# Altium PCB Slave.PcbDoc (part 1 of 2)
Units mm, origin at the board's own origin, x right, y up, seen from the top; angles counter-clockwise.
Board outline 380 x 63 mm, 4 copper layers (Top Copper, Signal Layer 1, Signal Layer 2, Bottom Copper), stack 1.57 mm thick; 247 components, 208 nets, 792 pads, 0 vias.
Unrouted connection lines stored in the file: 502.
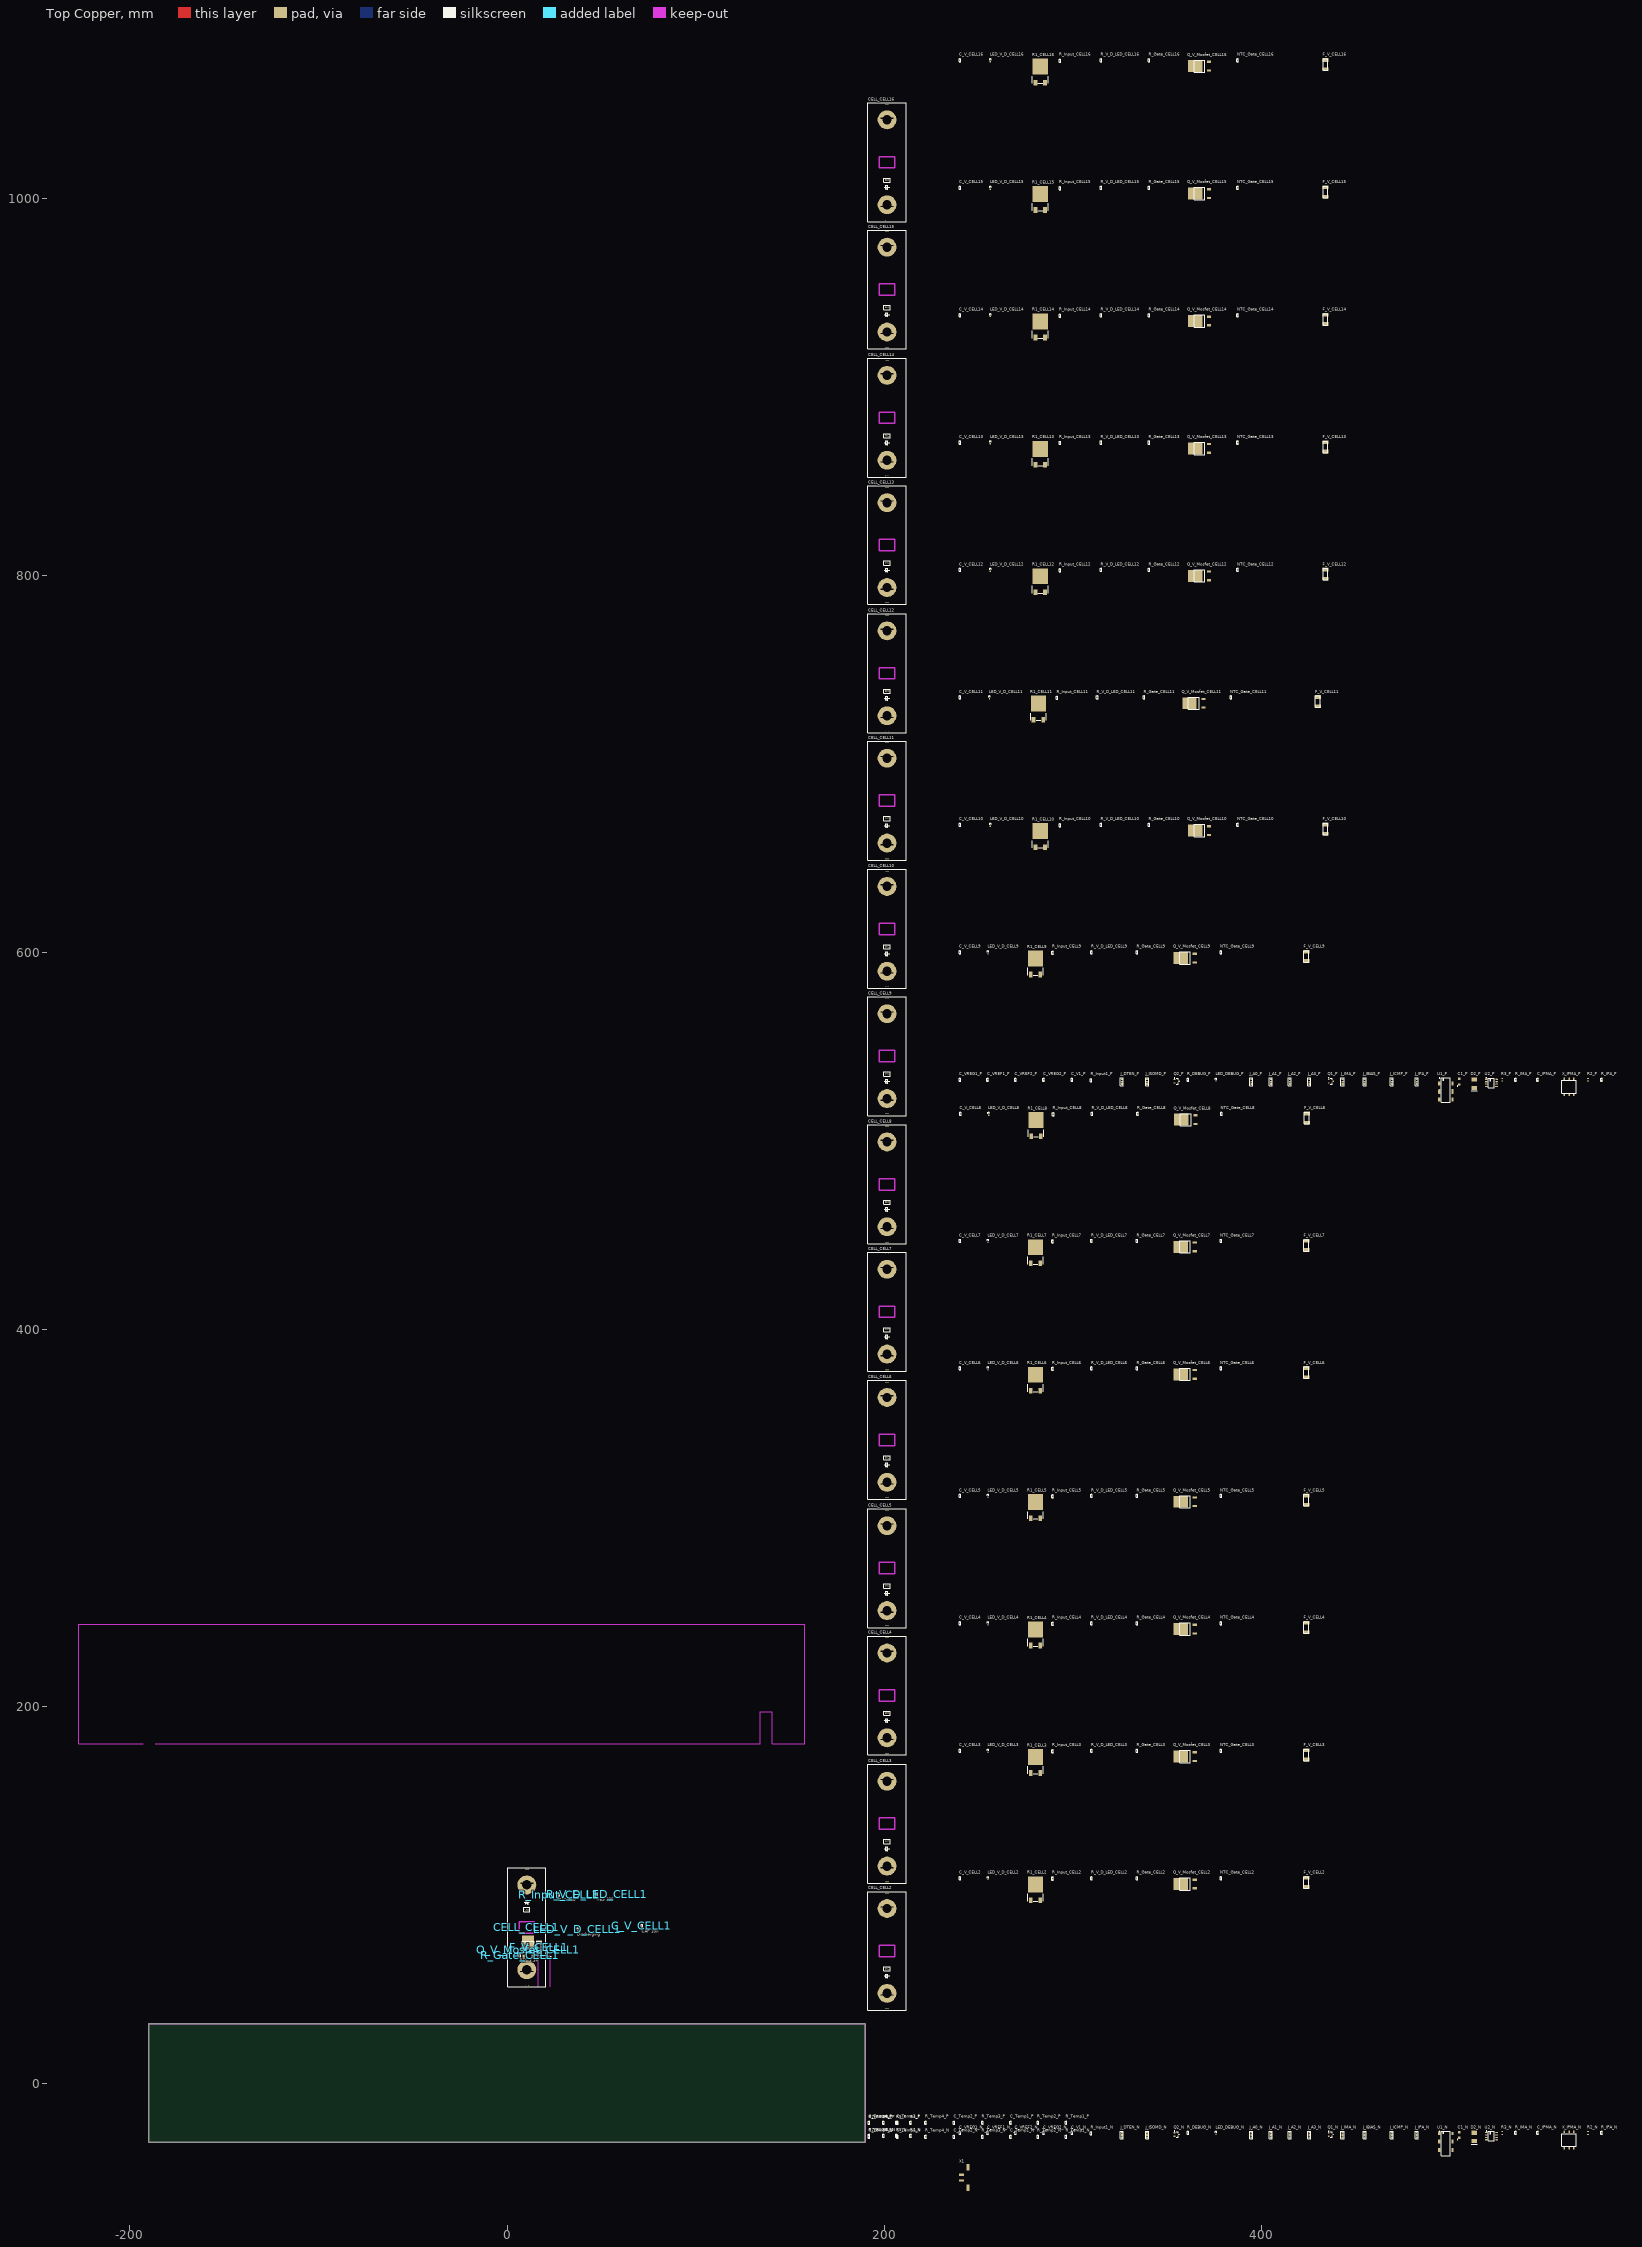
[diagram p0: Top Copper view]
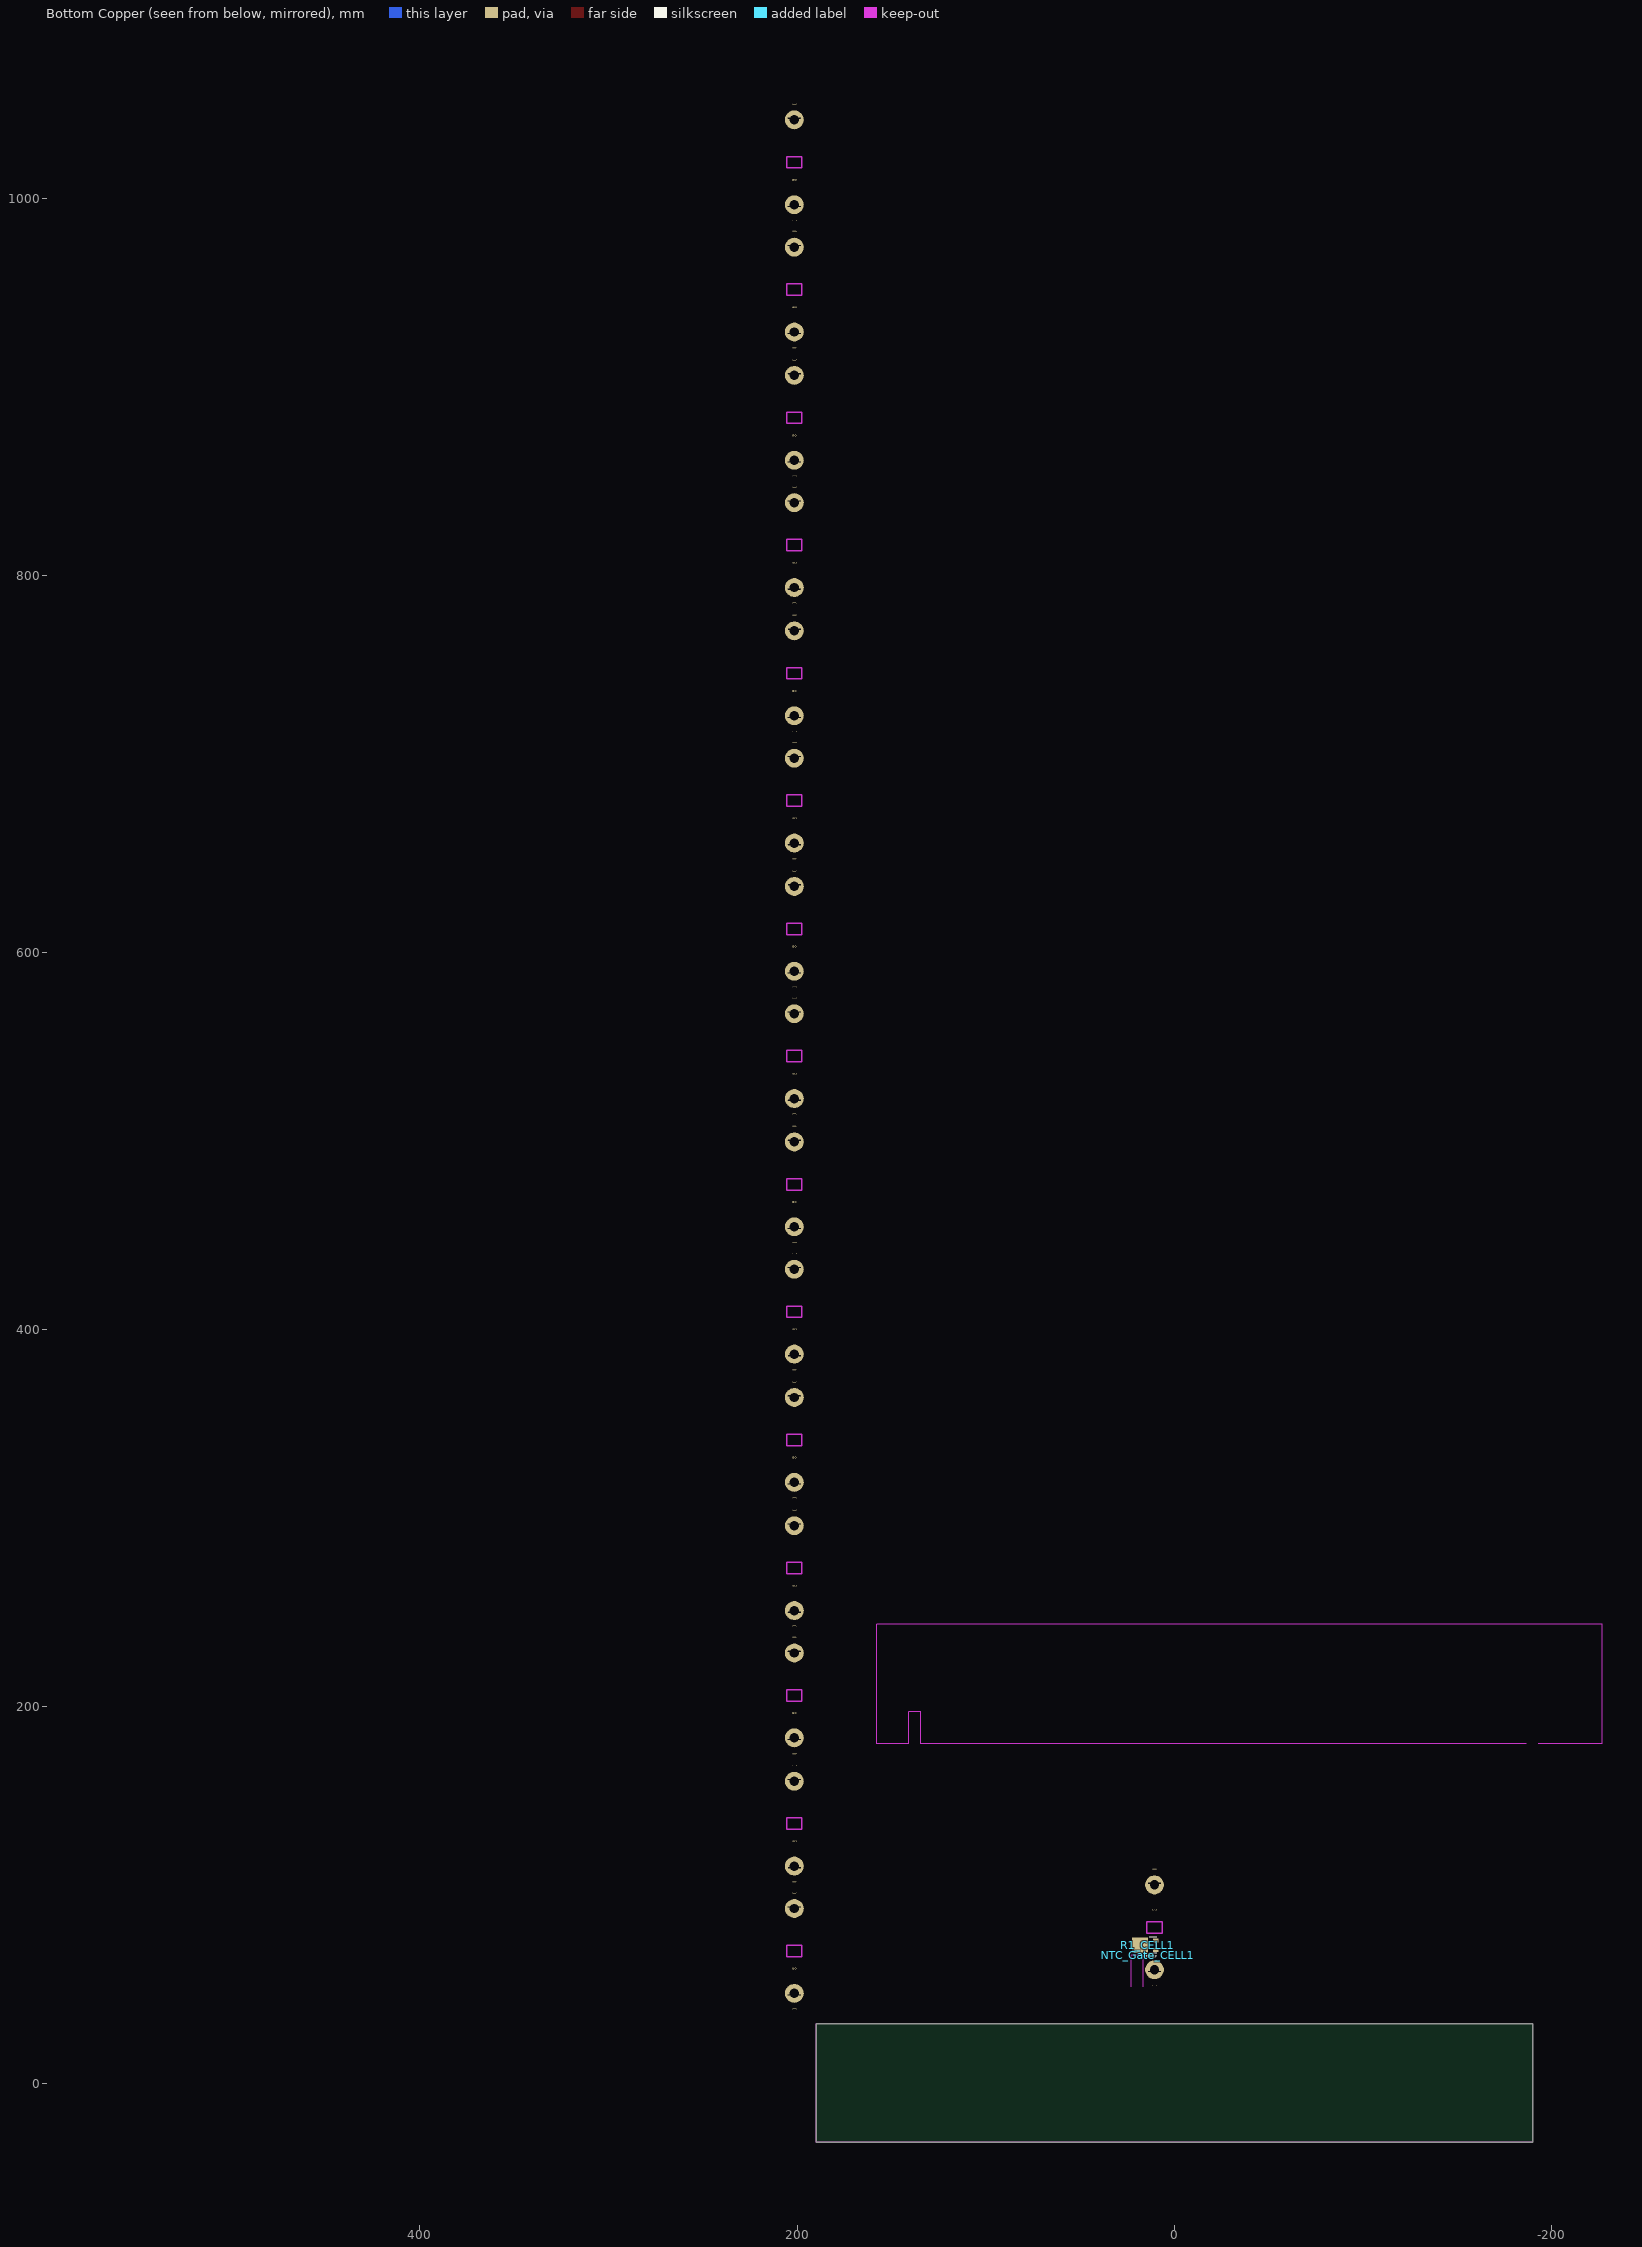
[diagram p1: Bottom Copper view, seen from below]

## Layer stack, top to bottom
Top Mask: solder mask 0.015, Solder Resist, Dk 3.8
Top Copper: signal copper 0.035
Dielectric 1: prepreg 0.2, 7628, Dk 4.6
Signal Layer 1: signal copper 0.0175
Core: core 1.065, FR-4, Dk 4.5
Signal Layer 2: signal copper 0.0175
Dielectric 2: prepreg 0.2, 7628, Dk 4.6
Bottom Copper: signal copper 0.035
Bottom Mask: solder mask 0.015, Solder Resist, Dk 3.8

## Board outline
-190,-31 190,-31 190,32 -190,32

## Design rules (kind name [scope] priority, off if disabled: settings)
Clearance [All] p1: gap=0.254 ignorepadtopadclearanceinfootprint=FALSE except(0: Arc-Hole Track-Hole SMDPad-Hole THPad-Hole Via-Hole Fill-Hole Poly-Hole Region-Hole Text-Hole)
ComponentClearance [All] p1: gap=0 collisioncheckmode=3 verticalgap=0 showdistances=FALSE
PolygonConnect [All] p1: connectstyle=Relief reliefconductorwidth=0.254 reliefentries=4 polygonreliefangle="90 Angle" airgapwidth=0.254
RoomDefinition Slave [InComponentClass('Slave')] p1: confinementstyle=ConfineIn formatcopy=TRUE lockcomponents=FALSE outline 239.443,-57.076 247.19,-57.076 247.19,-39.804 239.443,-39.804
RoomDefinition P [InComponentClass('P')] p2: confinementstyle=ConfineIn formatcopy=TRUE lockcomponents=FALSE outline 239.443,520.012 590.598,520.012 590.598,536.776 239.443,536.776
RoomDefinition N [InComponentClass('N')] p3: confinementstyle=ConfineIn formatcopy=TRUE lockcomponents=FALSE outline 239.443,-38.534 590.598,-38.534 590.598,-21.77 239.443,-21.77
RoomDefinition CELL16 [InComponentClass('CELL16')] p4: confinementstyle=ConfineIn formatcopy=TRUE lockcomponents=FALSE outline 239.443,1010.994 447.469,1010.994 447.469,1077.288 239.443,1077.288
RoomDefinition CELL15 [InComponentClass('CELL15')] p5: confinementstyle=ConfineIn formatcopy=TRUE lockcomponents=FALSE outline 239.443,943.43 447.469,943.43 447.469,1009.724 239.443,1009.724
RoomDefinition CELL14 [InComponentClass('CELL14')] p6: confinementstyle=ConfineIn formatcopy=TRUE lockcomponents=FALSE outline 239.443,875.866 447.469,875.866 447.469,942.16 239.443,942.16
RoomDefinition CELL13 [InComponentClass('CELL13')] p7: confinementstyle=ConfineIn formatcopy=TRUE lockcomponents=FALSE outline 239.443,808.302 447.469,808.302 447.469,874.596 239.443,874.596
RoomDefinition CELL12 [InComponentClass('CELL12')] p8: confinementstyle=ConfineIn formatcopy=TRUE lockcomponents=FALSE outline 239.443,740.738 447.469,740.738 447.469,807.032 239.443,807.032
RoomDefinition CELL11 [InComponentClass('CELL11')] p9: confinementstyle=ConfineIn formatcopy=TRUE lockcomponents=FALSE outline 239.443,673.174 442.897,673.174 442.897,739.468 239.443,739.468
RoomDefinition CELL10 [InComponentClass('CELL10')] p10: confinementstyle=ConfineIn formatcopy=TRUE lockcomponents=FALSE outline 239.443,605.61 447.469,605.61 447.469,671.904 239.443,671.904
RoomDefinition CELL9 [InComponentClass('CELL9')] p11: confinementstyle=ConfineIn formatcopy=TRUE lockcomponents=FALSE outline 239.443,538.046 436.039,538.046 436.039,604.34 239.443,604.34
RoomDefinition CELL8 [InComponentClass('CELL8')] p12: confinementstyle=ConfineIn formatcopy=TRUE lockcomponents=FALSE outline 239.735,452.351 436.331,452.351 436.331,518.645 239.735,518.645
RoomDefinition CELL7 [InComponentClass('CELL7')] p13: confinementstyle=ConfineIn formatcopy=TRUE lockcomponents=FALSE outline 239.443,384.884 436.039,384.884 436.039,451.178 239.443,451.178
RoomDefinition CELL6 [InComponentClass('CELL6')] p14: confinementstyle=ConfineIn formatcopy=TRUE lockcomponents=FALSE outline 239.443,317.32 436.039,317.32 436.039,383.614 239.443,383.614
RoomDefinition CELL5 [InComponentClass('CELL5')] p15: confinementstyle=ConfineIn formatcopy=TRUE lockcomponents=FALSE outline 239.443,249.756 436.039,249.756 436.039,316.05 239.443,316.05
RoomDefinition CELL4 [InComponentClass('CELL4')] p16: confinementstyle=ConfineIn formatcopy=TRUE lockcomponents=FALSE outline 239.443,182.192 436.039,182.192 436.039,248.486 239.443,248.486
RoomDefinition CELL3 [InComponentClass('CELL3')] p17: confinementstyle=ConfineIn formatcopy=TRUE lockcomponents=FALSE outline 239.443,114.628 436.039,114.628 436.039,180.922 239.443,180.922
RoomDefinition CELL2 [InComponentClass('CELL2')] p18: confinementstyle=ConfineIn formatcopy=TRUE lockcomponents=FALSE outline 239.443,47.064 436.039,47.064 436.039,113.358 239.443,113.358
RoomDefinition CELL1 [InComponentClass('CELL1')] p19: confinementstyle=ConfineIn formatcopy=TRUE lockcomponents=FALSE outline 0,50 22.8,50 22.8,116.294 0,116.294
RoutingVias [All] p1: holewidth=0.711 width=1.27 viastyle="Through Hole" minholewidth=0.711 minwidth=1.27 maxholewidth=0.711 maxwidth=1.27
SolderMaskExpansion [All] p1: expansion=0.102
Width [All] p1: maxlimit=0.254 minlimit=0.254 preferedwidth=0.254
29 further rules are at their usual default settings.

## Classes and differential pairs
channel class Half_Slave: N P
channel class Cells: U_Cells1 U_Cells2
channel class Cell: CELL1 CELL2 CELL3 CELL4 CELL5 CELL6 CELL7 CELL8 CELL9 CELL10 CELL11 CELL12 CELL13 CELL14 CELL15 CELL16
component class Slave: X1
component class P: C1_P C_IPMA_P C_Temp1_P C_Temp2_P C_Temp3_P C_Temp4_P C_V1_P C_VREF1_P C_VREF2_P C_VREG1_P C_VREG2_P D2_P J_A0_P J_A1_P J_A2_P J_A3_P J_DTEN_P J_IBIAS_P J_ICMP_P J_IMA_P J_IPA_P J_ISOMD_P LED_DEBUG_P Q1_P Q2_P R2_P R3_P R4_P R5_P R6_P R7_P R_DEBUG_P R_IMA_P R_Input1_P R_IPA_P R_Temp1_P R_Temp2_P R_Temp3_P R_Temp4_P R_VREGPU_P U1_P U2_P X_IPMA_P
component class N: C1_N C_IPMA_N C_Temp1_N C_Temp2_N C_Temp3_N C_Temp4_N C_V1_N C_VREF1_N C_VREF2_N C_VREG1_N C_VREG2_N D2_N J_A0_N J_A1_N J_A2_N J_A3_N J_DTEN_N J_IBIAS_N J_ICMP_N J_IMA_N J_IPA_N J_ISOMD_N LED_DEBUG_N Q1_N Q2_N R2_N R3_N R4_N R5_N R6_N R7_N R_DEBUG_N R_IMA_N R_Input1_N R_IPA_N R_Temp1_N R_Temp2_N R_Temp3_N R_Temp4_N R_VREGPU_N U1_N U2_N X_IPMA_N
component class CELL16: C_V_CELL16 CELL_CELL16 F_V_CELL16 LED_V_D_CELL16 NTC_Gate_CELL16 Q_V_Mosfet_CELL16 R1_CELL16 R_Gate_CELL16 R_Input_CELL16 R_V_D_LED_CELL16
component class CELL15: C_V_CELL15 CELL_CELL15 F_V_CELL15 LED_V_D_CELL15 NTC_Gate_CELL15 Q_V_Mosfet_CELL15 R1_CELL15 R_Gate_CELL15 R_Input_CELL15 R_V_D_LED_CELL15
component class CELL14: C_V_CELL14 CELL_CELL14 F_V_CELL14 LED_V_D_CELL14 NTC_Gate_CELL14 Q_V_Mosfet_CELL14 R1_CELL14 R_Gate_CELL14 R_Input_CELL14 R_V_D_LED_CELL14
component class CELL13: C_V_CELL13 CELL_CELL13 F_V_CELL13 LED_V_D_CELL13 NTC_Gate_CELL13 Q_V_Mosfet_CELL13 R1_CELL13 R_Gate_CELL13 R_Input_CELL13 R_V_D_LED_CELL13
component class CELL12: C_V_CELL12 CELL_CELL12 F_V_CELL12 LED_V_D_CELL12 NTC_Gate_CELL12 Q_V_Mosfet_CELL12 R1_CELL12 R_Gate_CELL12 R_Input_CELL12 R_V_D_LED_CELL12
component class CELL11: C_V_CELL11 CELL_CELL11 F_V_CELL11 LED_V_D_CELL11 NTC_Gate_CELL11 Q_V_Mosfet_CELL11 R1_CELL11 R_Gate_CELL11 R_Input_CELL11 R_V_D_LED_CELL11
component class CELL10: C_V_CELL10 CELL_CELL10 F_V_CELL10 LED_V_D_CELL10 NTC_Gate_CELL10 Q_V_Mosfet_CELL10 R1_CELL10 R_Gate_CELL10 R_Input_CELL10 R_V_D_LED_CELL10
component class CELL9: C_V_CELL9 CELL_CELL9 F_V_CELL9 LED_V_D_CELL9 NTC_Gate_CELL9 Q_V_Mosfet_CELL9 R1_CELL9 R_Gate_CELL9 R_Input_CELL9 R_V_D_LED_CELL9
component class CELL8: C_V_CELL8 CELL_CELL8 F_V_CELL8 LED_V_D_CELL8 NTC_Gate_CELL8 Q_V_Mosfet_CELL8 R1_CELL8 R_Gate_CELL8 R_Input_CELL8 R_V_D_LED_CELL8
component class CELL7: C_V_CELL7 CELL_CELL7 F_V_CELL7 LED_V_D_CELL7 NTC_Gate_CELL7 Q_V_Mosfet_CELL7 R1_CELL7 R_Gate_CELL7 R_Input_CELL7 R_V_D_LED_CELL7
component class CELL6: C_V_CELL6 CELL_CELL6 F_V_CELL6 LED_V_D_CELL6 NTC_Gate_CELL6 Q_V_Mosfet_CELL6 R1_CELL6 R_Gate_CELL6 R_Input_CELL6 R_V_D_LED_CELL6
component class CELL5: C_V_CELL5 CELL_CELL5 F_V_CELL5 LED_V_D_CELL5 NTC_Gate_CELL5 Q_V_Mosfet_CELL5 R1_CELL5 R_Gate_CELL5 R_Input_CELL5 R_V_D_LED_CELL5
component class CELL4: C_V_CELL4 CELL_CELL4 F_V_CELL4 LED_V_D_CELL4 NTC_Gate_CELL4 Q_V_Mosfet_CELL4 R1_CELL4 R_Gate_CELL4 R_Input_CELL4 R_V_D_LED_CELL4
component class CELL3: C_V_CELL3 CELL_CELL3 F_V_CELL3 LED_V_D_CELL3 NTC_Gate_CELL3 Q_V_Mosfet_CELL3 R1_CELL3 R_Gate_CELL3 R_Input_CELL3 R_V_D_LED_CELL3
component class CELL2: C_V_CELL2 CELL_CELL2 F_V_CELL2 LED_V_D_CELL2 NTC_Gate_CELL2 Q_V_Mosfet_CELL2 R1_CELL2 R_Gate_CELL2 R_Input_CELL2 R_V_D_LED_CELL2
component class CELL1: C_V_CELL1 CELL_CELL1 F_V_CELL1 LED_V_D_CELL1 NTC_Gate_CELL1 Q_V_Mosfet_CELL1 R1_CELL1 R_Gate_CELL1 R_Input_CELL1 R_V_D_LED_CELL1

## Components (designator, comment, footprint, x,y, rotation, side; value= is the part's Value field where it differs from the comment)
C1_N "CAP-1206" CAPCP3216X16N 505,-27.104 r90 top (schematic designator C1)
C1_P "CAP-1206" CAPCP3216X16N 505,531.442 r90 top (schematic designator C1)
C_IPMA_N "CAP 10n" CAP-0603 546.529,-25.961 r90 top (schematic designator C_IPMA)
C_IPMA_P "CAP 10n" CAP-0603 546.529,532.585 r90 top (schematic designator C_IPMA)
C_Temp1_N "CAP 10n" CAP-0603 266.999,-28 r90 top (schematic designator C_Temp1)
C_Temp1_P "CAP 10n" CAP-0603 266.999,-20.5 r90 top (schematic designator C_Temp1)
C_Temp2_N "CAP 10n" CAP-0603 236.999,-28 r90 top (schematic designator C_Temp2)
C_Temp2_P "CAP 10n" CAP-0603 236.999,-20.5 r90 top (schematic designator C_Temp2)
C_Temp3_N "CAP 10n" CAP-0603 206.999,-28 r90 top (schematic designator C_Temp3)
C_Temp3_P "CAP 10n" CAP-0603 206.999,-20.5 r90 top (schematic designator C_Temp3)
C_Temp4_N "CAP 10n" CAP-0603 191.999,-28 r90 top (schematic designator C_Temp4)
C_Temp4_P "CAP 10n" CAP-0603 191.999,-20.5 r90 top (schematic designator C_Temp4)
C_V1_N "CAP 10n" CAP-0603 299.514,-25.961 r90 top (schematic designator C_V1)
C_V1_P "CAP 10n" CAP-0603 299.514,532.585 r90 top (schematic designator C_V1)
C_V_CELL1 "CAP 10n" CAP-0603 71.551,83.738 r90 top (schematic designator C_V)
C_V_CELL2 "CAP 10n" CAP-0603 240.078,109.167 r90 top (schematic designator C_V)
C_V_CELL3 "CAP 10n" CAP-0603 240.078,176.731 r90 top (schematic designator C_V)
C_V_CELL4 "CAP 10n" CAP-0603 240.078,244.295 r90 top (schematic designator C_V)
C_V_CELL5 "CAP 10n" CAP-0603 240.078,311.859 r90 top (schematic designator C_V)
C_V_CELL6 "CAP 10n" CAP-0603 240.078,379.423 r90 top (schematic designator C_V)
C_V_CELL7 "CAP 10n" CAP-0603 240.078,446.987 r90 top (schematic designator C_V)
C_V_CELL8 "CAP 10n" CAP-0603 240.37,514.454 r90 top (schematic designator C_V)
C_V_CELL9 "CAP 10n" CAP-0603 240.078,600.149 r90 top (schematic designator C_V)
C_V_CELL10 "CAP 10n" CAP-0603 240.078,667.713 r90 top (schematic designator C_V)
C_V_CELL11 "CAP 10n" CAP-0603 240.078,735.277 r90 top (schematic designator C_V)
C_V_CELL12 "CAP 10n" CAP-0603 240.078,802.841 r90 top (schematic designator C_V)
C_V_CELL13 "CAP 10n" CAP-0603 240.078,870.405 r90 top (schematic designator C_V)
C_V_CELL14 "CAP 10n" CAP-0603 240.078,937.969 r90 top (schematic designator C_V)
C_V_CELL15 "CAP 10n" CAP-0603 240.078,1005.533 r90 top (schematic designator C_V)
C_V_CELL16 "CAP 10n" CAP-0603 240.078,1073.097 r90 top (schematic designator C_V)
C_VREF1_N "CAP 1u" CAP-0603 254.81,-25.961 r90 top (schematic designator C_VREF1)
C_VREF1_P "CAP 1u" CAP-0603 254.81,532.585 r90 top (schematic designator C_VREF1)
C_VREF2_N "CAP 1u" CAP-0603 269.542,-25.961 r90 top (schematic designator C_VREF2)
C_VREF2_P "CAP 1u" CAP-0603 269.542,532.585 r90 top (schematic designator C_VREF2)
C_VREG1_N "CAP 1u" CAP-0603 240.078,-25.961 r90 top (schematic designator C_VREG1)
C_VREG1_P "CAP 1u" CAP-0603 240.078,532.585 r90 top (schematic designator C_VREG1)
C_VREG2_N "CAP 1u" CAP-0603 284.528,-25.961 r90 top (schematic designator C_VREG2)
C_VREG2_P "CAP 1u" CAP-0603 284.528,532.585 r90 top (schematic designator C_VREG2)
CELL_CELL1 "Li1x7pVTC6T with Clip Mounts" Li1x7pVTC6T_Clips 10.5,83 r180 top (schematic designator CELL)
CELL_CELL2 "Li1x7pVTC6T with Clip Mounts" Li1x7pVTC6T_Clips 201.499,70.5 r0 top (schematic designator CELL)
CELL_CELL3 "Li1x7pVTC6T with Clip Mounts" Li1x7pVTC6T_Clips 201.499,137.999 r0 top (schematic designator CELL)
CELL_CELL4 "Li1x7pVTC6T with Clip Mounts" Li1x7pVTC6T_Clips 201.499,205.999 r0 top (schematic designator CELL)
CELL_CELL5 "Li1x7pVTC6T with Clip Mounts" Li1x7pVTC6T_Clips 201.499,273.499 r0 top (schematic designator CELL)
CELL_CELL6 "Li1x7pVTC6T with Clip Mounts" Li1x7pVTC6T_Clips 201.499,341.499 r0 top (schematic designator CELL)
CELL_CELL7 "Li1x7pVTC6T with Clip Mounts" Li1x7pVTC6T_Clips 201.499,409.499 r0 top (schematic designator CELL)
CELL_CELL8 "Li1x7pVTC6T with Clip Mounts" Li1x7pVTC6T_Clips 201.499,476.999 r0 top (schematic designator CELL)
CELL_CELL9 "Li1x7pVTC6T with Clip Mounts" Li1x7pVTC6T_Clips 201.499,544.999 r0 top (schematic designator CELL)
CELL_CELL10 "Li1x7pVTC6T with Clip Mounts" Li1x7pVTC6T_Clips 201.499,612.499 r0 top (schematic designator CELL)
CELL_CELL11 "Li1x7pVTC6T with Clip Mounts" Li1x7pVTC6T_Clips 201.499,680.498 r0 top (schematic designator CELL)
CELL_CELL12 "Li1x7pVTC6T with Clip Mounts" Li1x7pVTC6T_Clips 201.499,747.998 r0 top (schematic designator CELL)
CELL_CELL13 "Li1x7pVTC6T with Clip Mounts" Li1x7pVTC6T_Clips 201.499,815.998 r0 top (schematic designator CELL)
CELL_CELL14 "Li1x7pVTC6T with Clip Mounts" Li1x7pVTC6T_Clips 201.499,883.498 r0 top (schematic designator CELL)
CELL_CELL15 "Li1x7pVTC6T with Clip Mounts" Li1x7pVTC6T_Clips 201.499,951.498 r0 top (schematic designator CELL)
CELL_CELL16 "Li1x7pVTC6T with Clip Mounts" Li1x7pVTC6T_Clips 201.499,1018.998 r0 top (schematic designator CELL)
D2_N "?" SMB 512.874,-28.12 r90 top (schematic designator D2)
D2_P "?" SMB 512.874,530.426 r90 top (schematic designator D2)
F_V_CELL1 "1A Fuse" 2410SMD 17,72.5 r90 top (schematic designator F_V)
F_V_CELL2 "1A Fuse" 2410SMD 423.847,106.881 r90 top (schematic designator F_V)
F_V_CELL3 "1A Fuse" 2410SMD 423.847,174.445 r90 top (schematic designator F_V)
F_V_CELL4 "1A Fuse" 2410SMD 423.847,242.009 r90 top (schematic designator F_V)
F_V_CELL5 "1A Fuse" 2410SMD 423.847,309.573 r90 top (schematic designator F_V)
F_V_CELL6 "1A Fuse" 2410SMD 423.847,377.137 r90 top (schematic designator F_V)
F_V_CELL7 "1A Fuse" 2410SMD 423.847,444.701 r90 top (schematic designator F_V)
F_V_CELL8 "1A Fuse" 2410SMD 424.139,512.168 r90 top (schematic designator F_V)
F_V_CELL9 "1A Fuse" 2410SMD 423.847,597.863 r90 top (schematic designator F_V)
F_V_CELL10 "1A Fuse" 2410SMD 434.007,665.427 r90 top (schematic designator F_V)
F_V_CELL11 "1A Fuse" 2410SMD 429.943,732.991 r90 top (schematic designator F_V)
F_V_CELL12 "1A Fuse" 2410SMD 434.007,800.555 r90 top (schematic designator F_V)
F_V_CELL13 "1A Fuse" 2410SMD 434.007,868.119 r90 top (schematic designator F_V)
F_V_CELL14 "1A Fuse" 2410SMD 434.007,935.683 r90 top (schematic designator F_V)
F_V_CELL15 "1A Fuse" 2410SMD 434.007,1003.247 r90 top (schematic designator F_V)
F_V_CELL16 "1A Fuse" 2410SMD 434.007,1070.811 r90 top (schematic designator F_V)
J_A0_N "DPDT Solder Jumper" "DPDT Solder" 394.637,-27.104 r90 top (schematic designator J_A0)
J_A0_P "DPDT Solder Jumper" "DPDT Solder" 394.637,531.442 r90 top (schematic designator J_A0)
J_A1_N "DPDT Solder Jumper" "DPDT Solder" 405.051,-27.104 r90 top (schematic designator J_A1)
J_A1_P "DPDT Solder Jumper" "DPDT Solder" 405.051,531.442 r90 top (schematic designator J_A1)
J_A2_N "DPDT Solder Jumper" "DPDT Solder" 415.084,-27.104 r90 top (schematic designator J_A2)
J_A2_P "DPDT Solder Jumper" "DPDT Solder" 415.084,531.442 r90 top (schematic designator J_A2)
J_A3_N "DPDT Solder Jumper" "DPDT Solder" 425.498,-27.104 r90 top (schematic designator J_A3)
J_A3_P "DPDT Solder Jumper" "DPDT Solder" 425.498,531.442 r90 top (schematic designator J_A3)
J_DTEN_N "DPDT Solder Jumper" "DPDT Solder" 326.057,-27.104 r90 top (schematic designator J_DTEN)
J_DTEN_P "DPDT Solder Jumper" "DPDT Solder" 326.057,531.442 r90 top (schematic designator J_DTEN)
J_IBIAS_N "DPDT Solder Jumper" "DPDT Solder" 454.708,-27.104 r90 top (schematic designator J_IBIAS)
J_IBIAS_P "DPDT Solder Jumper" "DPDT Solder" 454.708,531.442 r90 top (schematic designator J_IBIAS)
J_ICMP_N "DPDT Solder Jumper" "DPDT Solder" 469.186,-27.104 r90 top (schematic designator J_ICMP)
J_ICMP_P "DPDT Solder Jumper" "DPDT Solder" 469.186,531.442 r90 top (schematic designator J_ICMP)
J_IMA_N "DPDT Solder Jumper" "DPDT Solder" 443.024,-27.104 r90 top (schematic designator J_IMA)
J_IMA_P "DPDT Solder Jumper" "DPDT Solder" 443.024,531.442 r90 top (schematic designator J_IMA)
J_IPA_N "DPDT Solder Jumper" "DPDT Solder" 482.394,-27.104 r90 top (schematic designator J_IPA)
J_IPA_P "DPDT Solder Jumper" "DPDT Solder" 482.394,531.442 r90 top (schematic designator J_IPA)
J_ISOMD_N "DPDT Solder Jumper" "DPDT Solder" 339.392,-27.104 r90 top (schematic designator J_ISOMD)
J_ISOMD_P "DPDT Solder Jumper" "DPDT Solder" 339.392,531.442 r90 top (schematic designator J_ISOMD)
LED_DEBUG_N "DEBUG" LED-0603 375.968,-25.961 r90 top (schematic designator LED_DEBUG)
LED_DEBUG_P "DEBUG" LED-0603 375.968,532.585 r90 top (schematic designator LED_DEBUG)
LED_V_D_CELL1 "Discharging" LED-0603 37.5,82 r90 top (schematic designator LED_V_D)
LED_V_D_CELL2 "Discharging" LED-0603 255.064,109.167 r90 top (schematic designator LED_V_D)
LED_V_D_CELL3 "Discharging" LED-0603 255.064,176.731 r90 top (schematic designator LED_V_D)
LED_V_D_CELL4 "Discharging" LED-0603 255.064,244.295 r90 top (schematic designator LED_V_D)
LED_V_D_CELL5 "Discharging" LED-0603 255.064,311.859 r90 top (schematic designator LED_V_D)
LED_V_D_CELL6 "Discharging" LED-0603 255.064,379.423 r90 top (schematic designator LED_V_D)
LED_V_D_CELL7 "Discharging" LED-0603 255.064,446.987 r90 top (schematic designator LED_V_D)
LED_V_D_CELL8 "Discharging" LED-0603 255.356,514.454 r90 top (schematic designator LED_V_D)
LED_V_D_CELL9 "Discharging" LED-0603 255.064,600.149 r90 top (schematic designator LED_V_D)
LED_V_D_CELL10 "Discharging" LED-0603 256.334,667.713 r90 top (schematic designator LED_V_D)
LED_V_D_CELL11 "Discharging" LED-0603 255.826,735.277 r90 top (schematic designator LED_V_D)
LED_V_D_CELL12 "Discharging" LED-0603 256.334,802.841 r90 top (schematic designator LED_V_D)
LED_V_D_CELL13 "Discharging" LED-0603 256.334,870.405 r90 top (schematic designator LED_V_D)
LED_V_D_CELL14 "Discharging" LED-0603 256.334,937.969 r90 top (schematic designator LED_V_D)
LED_V_D_CELL15 "Discharging" LED-0603 256.334,1005.533 r90 top (schematic designator LED_V_D)
LED_V_D_CELL16 "Discharging" LED-0603 256.334,1073.097 r90 top (schematic designator LED_V_D)
NTC_Gate_CELL1 "NTC 100K" NTC-0603 14,68.325 r0 bottom (schematic designator NTC_Gate)
NTC_Gate_CELL2 "NTC 100K" NTC-0603 378.508,109.167 r90 top (schematic designator NTC_Gate)
NTC_Gate_CELL3 "NTC 100K" NTC-0603 378.508,176.731 r90 top (schematic designator NTC_Gate)
NTC_Gate_CELL4 "NTC 100K" NTC-0603 378.508,244.295 r90 top (schematic designator NTC_Gate)
NTC_Gate_CELL5 "NTC 100K" NTC-0603 378.508,311.859 r90 top (schematic designator NTC_Gate)
NTC_Gate_CELL6 "NTC 100K" NTC-0603 378.508,379.423 r90 top (schematic designator NTC_Gate)
NTC_Gate_CELL7 "NTC 100K" NTC-0603 378.508,446.987 r90 top (schematic designator NTC_Gate)
NTC_Gate_CELL8 "NTC 100K" NTC-0603 378.8,514.454 r90 top (schematic designator NTC_Gate)
NTC_Gate_CELL9 "NTC 100K" NTC-0603 378.508,600.149 r90 top (schematic designator NTC_Gate)
NTC_Gate_CELL10 "NTC 100K" NTC-0603 387.398,667.713 r90 top (schematic designator NTC_Gate)
NTC_Gate_CELL11 "NTC 100K" NTC-0603 383.842,735.277 r90 top (schematic designator NTC_Gate)
NTC_Gate_CELL12 "NTC 100K" NTC-0603 387.398,802.841 r90 top (schematic designator NTC_Gate)
NTC_Gate_CELL13 "NTC 100K" NTC-0603 387.398,870.405 r90 top (schematic designator NTC_Gate)
NTC_Gate_CELL14 "NTC 100K" NTC-0603 387.398,937.969 r90 top (schematic designator NTC_Gate)
NTC_Gate_CELL15 "NTC 100K" NTC-0603 387.398,1005.533 r90 top (schematic designator NTC_Gate)
NTC_Gate_CELL16 "NTC 100K" NTC-0603 387.398,1073.097 r90 top (schematic designator NTC_Gate)
Q1_N "NMOS-SOT23" SOT23 436.928,-26.85 r0 top (schematic designator Q1)
Q1_P "NMOS-SOT23" SOT23 436.928,531.696 r0 top (schematic designator Q1)
Q2_N "NMOS-SOT23" SOT23 355.14,-26.85 r0 top (schematic designator Q2)
Q2_P "NMOS-SOT23" SOT23 355.14,531.696 r0 top (schematic designator Q2)
Q_V_Mosfet_CELL1 "" TO252 11.179,74.909 r0 top (schematic designator Q_V_Mosfet)
Q_V_Mosfet_CELL2 "" TO252 357.299,105.992 r90 top (schematic designator Q_V_Mosfet)
Q_V_Mosfet_CELL3 "" TO252 357.299,173.556 r90 top (schematic designator Q_V_Mosfet)
Q_V_Mosfet_CELL4 "" TO252 357.299,241.12 r90 top (schematic designator Q_V_Mosfet)
Q_V_Mosfet_CELL5 "" TO252 357.299,308.684 r90 top (schematic designator Q_V_Mosfet)
Q_V_Mosfet_CELL6 "" TO252 357.299,376.248 r90 top (schematic designator Q_V_Mosfet)
Q_V_Mosfet_CELL7 "" TO252 357.299,443.812 r90 top (schematic designator Q_V_Mosfet)
Q_V_Mosfet_CELL8 "" TO252 357.591,511.279 r90 top (schematic designator Q_V_Mosfet)
Q_V_Mosfet_CELL9 "" TO252 357.299,596.974 r90 top (schematic designator Q_V_Mosfet)
Q_V_Mosfet_CELL10 "" TO252 364.919,664.538 r90 top (schematic designator Q_V_Mosfet)
Q_V_Mosfet_CELL11 "" TO252 361.871,732.102 r90 top (schematic designator Q_V_Mosfet)
Q_V_Mosfet_CELL12 "" TO252 364.919,799.666 r90 top (schematic designator Q_V_Mosfet)
Q_V_Mosfet_CELL13 "" TO252 364.919,867.23 r90 top (schematic designator Q_V_Mosfet)
Q_V_Mosfet_CELL14 "" TO252 364.919,934.794 r90 top (schematic designator Q_V_Mosfet)
Q_V_Mosfet_CELL15 "" TO252 364.919,1002.358 r90 top (schematic designator Q_V_Mosfet)
Q_V_Mosfet_CELL16 "" TO252 364.919,1069.922 r90 top (schematic designator Q_V_Mosfet)
R1_CELL1 "RES-EP" RES-TO252 14,73.5 r90 bottom value=? (schematic designator R1)
R1_CELL2 "RES-EP" RES-TO252 280.21,101.547 r0 top value=? (schematic designator R1)
R1_CELL3 "RES-EP" RES-TO252 280.21,169.111 r0 top value=? (schematic designator R1)
R1_CELL4 "RES-EP" RES-TO252 280.21,236.675 r0 top value=? (schematic designator R1)
R1_CELL5 "RES-EP" RES-TO252 280.21,304.239 r0 top value=? (schematic designator R1)
R1_CELL6 "RES-EP" RES-TO252 280.21,371.803 r0 top value=? (schematic designator R1)
R1_CELL7 "RES-EP" RES-TO252 280.21,439.367 r0 top value=? (schematic designator R1)
R1_CELL8 "RES-EP" RES-TO252 280.502,506.834 r0 top value=? (schematic designator R1)
R1_CELL9 "RES-EP" RES-TO252 280.21,592.529 r0 top value=? (schematic designator R1)
R1_CELL10 "RES-EP" RES-TO252 282.75,660.093 r0 top value=? (schematic designator R1)
R1_CELL11 "RES-EP" RES-TO252 281.734,727.657 r0 top value=? (schematic designator R1)
R1_CELL12 "RES-EP" RES-TO252 282.75,795.221 r0 top value=? (schematic designator R1)
R1_CELL13 "RES-EP" RES-TO252 282.75,862.785 r0 top value=? (schematic designator R1)
R1_CELL14 "RES-EP" RES-TO252 282.75,930.349 r0 top value=? (schematic designator R1)
R1_CELL15 "RES-EP" RES-TO252 282.75,997.913 r0 top value=? (schematic designator R1)
R1_CELL16 "RES-EP" RES-TO252 282.75,1065.477 r0 top value=? (schematic designator R1)
R2_N "1K" RES-0603#1 573.199,-26.088 r90 top value=? (schematic designator R2)
R2_P "1K" RES-0603#1 573.199,532.458 r90 top value=? (schematic designator R2)
R3_N "1K" RES-0603#1 527.733,-26.088 r90 top value=? (schematic designator R3)
R3_P "1K" RES-0603#1 527.733,532.458 r90 top value=? (schematic designator R3)
R4_N "1K" RES-0603#2 213.999,-27.5 r90 top (schematic designator R4)
R4_P "1K" RES-0603#2 213.999,-20.5 r90 top (schematic designator R4)
R5_N "1K" RES-0603#2 206.499,-27.5 r90 top (schematic designator R5)
R5_P "1K" RES-0603#2 206.499,-20.5 r90 top (schematic designator R5)
R6_N "1K" RES-0603#2 199.499,-27.5 r90 top (schematic designator R6)
R6_P "1K" RES-0603#2 199.499,-20.5 r90 top (schematic designator R6)
R7_N "1K" RES-0603#2 191.999,-27.5 r90 top (schematic designator R7)
R7_P "1K" RES-0603#2 191.999,-20.5 r90 top (schematic designator R7)
R_DEBUG_N "RES 500" RES-0603#2 360.982,-25.961 r90 top (schematic designator R_DEBUG)
R_DEBUG_P "RES 500" RES-0603#2 360.982,532.585 r90 top (schematic designator R_DEBUG)
R_Gate_CELL1 "RES 3.3K" RES-0603#2 7,68.25 r90 top (schematic designator R_Gate)
R_Gate_CELL2 "RES 3.3K" RES-0603#2 334.058,109.167 r90 top (schematic designator R_Gate)
R_Gate_CELL3 "RES 3.3K" RES-0603#2 334.058,176.731 r90 top (schematic designator R_Gate)
R_Gate_CELL4 "RES 3.3K" RES-0603#2 334.058,244.295 r90 top (schematic designator R_Gate)
R_Gate_CELL5 "RES 3.3K" RES-0603#2 334.058,311.859 r90 top (schematic designator R_Gate)
R_Gate_CELL6 "RES 3.3K" RES-0603#2 334.058,379.423 r90 top (schematic designator R_Gate)
R_Gate_CELL7 "RES 3.3K" RES-0603#2 334.058,446.987 r90 top (schematic designator R_Gate)
R_Gate_CELL8 "RES 3.3K" RES-0603#2 334.35,514.454 r90 top (schematic designator R_Gate)
R_Gate_CELL9 "RES 3.3K" RES-0603#2 334.058,600.149 r90 top (schematic designator R_Gate)
R_Gate_CELL10 "RES 3.3K" RES-0603#2 340.408,667.713 r90 top (schematic designator R_Gate)
R_Gate_CELL11 "RES 3.3K" RES-0603#2 337.868,735.277 r90 top (schematic designator R_Gate)
R_Gate_CELL12 "RES 3.3K" RES-0603#2 340.408,802.841 r90 top (schematic designator R_Gate)
R_Gate_CELL13 "RES 3.3K" RES-0603#2 340.408,870.405 r90 top (schematic designator R_Gate)
R_Gate_CELL14 "RES 3.3K" RES-0603#2 340.408,937.969 r90 top (schematic designator R_Gate)
R_Gate_CELL15 "RES 3.3K" RES-0603#2 340.408,1005.533 r90 top (schematic designator R_Gate)
R_Gate_CELL16 "RES 3.3K" RES-0603#2 340.408,1073.097 r90 top (schematic designator R_Gate)
R_IMA_N "RES 50" RES-0603#2 534.845,-25.961 r90 top (schematic designator R_IMA)
R_IMA_P "RES 50" RES-0603#2 534.845,532.585 r90 top (schematic designator R_IMA)
R_Input1_N "RES 100" RES-0603#2 309.674,-26.215 r90 top (schematic designator R_Input1)
R_Input1_P "RES 100" RES-0603#2 309.674,532.331 r90 top (schematic designator R_Input1)
R_Input_CELL1 "RES 100" RES-0603#2 27.637,100.349 r90 top (schematic designator R_Input)
R_Input_CELL2 "RES 100" RES-0603#2 289.354,108.913 r90 top (schematic designator R_Input)
R_Input_CELL3 "RES 100" RES-0603#2 289.354,176.477 r90 top (schematic designator R_Input)
R_Input_CELL4 "RES 100" RES-0603#2 289.354,244.041 r90 top (schematic designator R_Input)
R_Input_CELL5 "RES 100" RES-0603#2 289.354,311.605 r90 top (schematic designator R_Input)
R_Input_CELL6 "RES 100" RES-0603#2 289.354,379.169 r90 top (schematic designator R_Input)
R_Input_CELL7 "RES 100" RES-0603#2 289.354,446.733 r90 top (schematic designator R_Input)
R_Input_CELL8 "RES 100" RES-0603#2 289.646,514.2 r90 top (schematic designator R_Input)
R_Input_CELL9 "RES 100" RES-0603#2 289.354,599.895 r90 top (schematic designator R_Input)
R_Input_CELL10 "RES 100" RES-0603#2 293.164,667.459 r90 top (schematic designator R_Input)
R_Input_CELL11 "RES 100" RES-0603#2 291.64,735.023 r90 top (schematic designator R_Input)
R_Input_CELL12 "RES 100" RES-0603#2 293.164,802.587 r90 top (schematic designator R_Input)
R_Input_CELL13 "RES 100" RES-0603#2 293.164,870.151 r90 top (schematic designator R_Input)
R_Input_CELL14 "RES 100" RES-0603#2 293.164,937.715 r90 top (schematic designator R_Input)
R_Input_CELL15 "RES 100" RES-0603#2 293.164,1005.279 r90 top (schematic designator R_Input)
R_Input_CELL16 "RES 100" RES-0603#2 293.164,1072.843 r90 top (schematic designator R_Input)
R_IPA_N "RES 50" RES-0603#2 580.438,-25.961 r90 top (schematic designator R_IPA)
R_IPA_P "RES 50" RES-0603#2 580.438,532.585 r90 top (schematic designator R_IPA)
R_Temp1_N "RES 100" RES-0603#2 296.499,-28 r90 top (schematic designator R_Temp1)
R_Temp1_P "RES 100" RES-0603#2 296.499,-20.5 r90 top (schematic designator R_Temp1)
R_Temp2_N "RES 100" RES-0603#2 281.499,-28 r90 top (schematic designator R_Temp2)
R_Temp2_P "RES 100" RES-0603#2 281.499,-20.5 r90 top (schematic designator R_Temp2)
R_Temp3_N "RES 100" RES-0603#2 251.999,-28 r90 top (schematic designator R_Temp3)
R_Temp3_P "RES 100" RES-0603#2 251.999,-20.5 r90 top (schematic designator R_Temp3)
R_Temp4_N "RES 100" RES-0603#2 221.999,-28 r90 top (schematic designator R_Temp4)
R_Temp4_P "RES 100" RES-0603#2 221.999,-20.5 r90 top (schematic designator R_Temp4)
R_V_D_LED_CELL1 "RES 300" RES-0603#2 47.703,100.603 r90 top (schematic designator R_V_D_LED)
R_V_D_LED_CELL2 "RES 300" RES-0603#2 309.928,109.167 r90 top (schematic designator R_V_D_LED)
R_V_D_LED_CELL3 "RES 300" RES-0603#2 309.928,176.731 r90 top (schematic designator R_V_D_LED)
R_V_D_LED_CELL4 "RES 300" RES-0603#2 309.928,244.295 r90 top (schematic designator R_V_D_LED)
R_V_D_LED_CELL5 "RES 300" RES-0603#2 309.928,311.859 r90 top (schematic designator R_V_D_LED)
R_V_D_LED_CELL6 "RES 300" RES-0603#2 309.928,379.423 r90 top (schematic designator R_V_D_LED)
R_V_D_LED_CELL7 "RES 300" RES-0603#2 309.928,446.987 r90 top (schematic designator R_V_D_LED)
R_V_D_LED_CELL8 "RES 300" RES-0603#2 310.22,514.454 r90 top (schematic designator R_V_D_LED)
R_V_D_LED_CELL9 "RES 300" RES-0603#2 309.928,600.149 r90 top (schematic designator R_V_D_LED)
R_V_D_LED_CELL10 "RES 300" RES-0603#2 315.008,667.713 r90 top (schematic designator R_V_D_LED)
R_V_D_LED_CELL11 "RES 300" RES-0603#2 312.976,735.277 r90 top (schematic designator R_V_D_LED)
R_V_D_LED_CELL12 "RES 300" RES-0603#2 315.008,802.841 r90 top (schematic designator R_V_D_LED)
R_V_D_LED_CELL13 "RES 300" RES-0603#2 315.008,870.405 r90 top (schematic designator R_V_D_LED)
R_V_D_LED_CELL14 "RES 300" RES-0603#2 315.008,937.969 r90 top (schematic designator R_V_D_LED)
R_V_D_LED_CELL15 "RES 300" RES-0603#2 315.008,1005.533 r90 top (schematic designator R_V_D_LED)
R_V_D_LED_CELL16 "RES 300" RES-0603#2 315.008,1073.097 r90 top (schematic designator R_V_D_LED)
R_VREGPU_N "10K" RES-0603#2 191.999,-27.5 r90 top (schematic designator R_VREGPU)
R_VREGPU_P "10K" RES-0603#2 191.999,-20.5 r90 top (schematic designator R_VREGPU)
U1_N "LT-LTC6811-2-G-48" SSOP-48N 497.888,-31.549 r0 top (schematic designator U1)
U1_P "LT-LTC6811-2-G-48" SSOP-48N 497.888,526.997 r0 top (schematic designator U1)
U2_N "TI-LP2951-50D8" SOIC127P600X175-8N 522.018,-27.739 r0 top (schematic designator U2)
U2_P "TI-LP2951-50D8" SOIC127P600X175-8N 522.018,530.807 r0 top (schematic designator U2)
X1 "Molex - Micro-Fit 3.0 Series connector,  3.00mm (0.118\") pitch header, 2 positions." 43650-0224 244.396,-49.71 r90 top
X_IPMA_N "HM2101NL" HM2101 563.166,-29.771 r0 top (schematic designator X_IPMA)
X_IPMA_P "HM2101NL" HM2101 563.166,528.775 r0 top (schematic designator X_IPMA)

## Footprints (in the part's own frame and the unit in brackets; to place one, negate y for a bottom-side part, rotate by r counter-clockwise, add the part's x,y. Pads: shape width x height; smd on the part's side, far side on the other; paste and mask are expansions set on the pad)
2410SMD [mm]
  rect 1.96x3.15 smd: 1(2.455,0) 2(-2.455,0)
  silkscreen extent -3.05,-1.27 3.05,1.27, body extent -3.05,-1.27 3.05,1.27, height 2.58
43650-0224 [mm]
  rect 1.27x2.54 smd: P$1(1.5,3.43) P$2(-1.5,3.43)
  rect 3.43x1.65 smd: TAB1(5.39,0) TAB2(-5.39,0)
  body extent -6.82,-2.47 6.83,4.1, height 9.95
CAP-0603 [mm]
  rect 0.8x0.75 smd: 1(-0.75,0) 2(0.75,0)
  silkscreen extent -0.8,-0.4 0.8,0.4, body extent -0.8,-0.4 0.8,0.42, height 0.81
CAPCP3216X16N [mm] "Chip Capacitor, 2-Leads, Body 3.20x1.60mm, IPC Medium Density"
  rect 1.2x1.2 smd: 1(-1.5,0) 2(1.5,0)
  silkscreen extent -2.4,0.9 -2.2,1.1, body extent -1.7,-0.9 1.7,0.9, height 1.7
"DPDT Solder" [mm]
  rrect20% 1x1 smd mask+0.2: 1(-1.3,0) 2(1.3,0) 3(0,0)
  silkscreen extent -2.1,-0.8 2.1,0.8
HM2101 [mm]
  rect 0.76x1.27 smd: 1(-2.54,-4.3) 2(0,-4.3) 3(2.54,-4.3) 4(2.54,4.3) 5(0,4.3) 6(-2.54,4.3)
  silkscreen extent -3.81,-3.36 3.81,3.36, body extent -3.81,-4.44 3.81,4.44, height 5.71
LED-0603 [mm]
  rect 0.8x0.75 smd: A(-0.75,0) K(0.75,0)
  silkscreen extent 0,-0.4 0.8,0.4, body extent -0.8,-0.4 0.8,0.4, height 0.53
Li1x7pVTC6T_Clips [mm]
  round 10 hole 5: +(0,22.5) -(0,-22.5)
  rrect100% 2.1x0.7 hole 0.35 slot 1.7 at 0 deg: +L(-2.54,23.38) +R(2.54,23.38) -L(-2.54,-23.38) -R(2.54,-23.38)
  rrect100% 2.1x0.7 hole 0.35 slot 1.7 at 0 deg copper offset 0,-0.15: +O(0,31)
  rrect100% 2.1x0.7 hole 0.35 slot 1.7 at 0 deg copper offset 0,0.15: -O(0,-31)
  round 1 hole 0.5: T+(0.625,-9.35) T-(-0.625,-9.35)
  Keep-Out Layer board cut-out: -4,3 4,3 4,-3 -4,-3
  Keep-Out Layer region: -4,-3 4,-3 4,3 -4,3
  silkscreen extent -10.15,-31.5 10.15,31.5
NTC-0603 [mm]
  rect 0.8x0.75 smd: 1(-0.75,0) 2(0.75,0)
  silkscreen extent -0.8,-0.4 0.8,0.4, body extent -0.8,-0.4 0.8,0.42, height 0.81
RES-0603#1 [mm] "Chip Resistor, 2-Leads, Body 1.58x0.85mm, IPC Medium Density"
  rect 0.5x0.9 smd: 1(-0.75,0) 2(0.75,0)
  body extent -0.82,-0.48 0.82,0.48, height 0.5
RES-0603#2 [mm]
  rect 0.8x0.75 smd: 1(-0.75,0) 2(0.75,0)
  silkscreen extent -0.8,-0.4 0.8,0.4, body extent -0.8,-0.4 0.8,0.4, height 0.44
RES-TO252 [mm] "Chip Resistor, 2-Leads, Body 6.30x3.15mm, IPC Medium Density"
  rect 2x3 smd: 1(-2.55,-4.245) 2(2.55,-4.245)
  rect 8x8.4 smd: 3(0,4.255)
  silkscreen extent -4.15,-4.64 4.15,-0.74, body extent -4.15,-4.65 4.15,7.35, height 0.89
SMB [mm]
  rect 2.159x2.743 smd: A(2.21,0) K(-2.21,0)
  silkscreen extent -3.9,-1.5 -3.9,1.5, body extent -2.79,-1.97 2.8,1.97, height 2.5
SOIC127P600X175-8N [mm] "SOIC, 8-Leads, Body 4.90x3.90mm, Pitch 1.27mm, IPC Medium Density"
  oval 1.45x0.6 smd: 1(-2.725,1.905) 2(-2.725,0.635) 3(-2.725,-0.635) 4(-2.725,-1.905) 5(2.725,-1.905) 6(2.725,-0.635) 7(2.725,0.635) 8(2.725,1.905)
  silkscreen extent -2.85,-2.5 1.6,2.88, body extent -3,-2.5 3,2.5, height 1.75
SOT23 [mm] "SOT23, 3-Leads, Body 2.90x2.37mm, Pitch 0.95mm, IPC Medium Density"
  rect 1x0.6 smd: 1(-1.2,0.95) 2(-1.2,-0.95) 3(1.2,0)
  silkscreen extent -1.32,-1.55 0.7,1.92, body extent -1.32,-1.53 1.32,1.53, height 1.11
SSOP-48N [mm]
  oval 1.25x0.25 smd: 1(-3.5,5.75) 2(-3.5,5.25) 3(-3.5,4.75) 4(-3.5,4.25) 5(-3.5,3.75) 6(-3.5,3.25) 7(-3.5,2.75) 8(-3.5,2.25) 9(-3.5,1.75) 10(-3.5,1.25) 11(-3.5,0.75) 12(-3.5,0.25) 13(-3.5,-0.25) 14(-3.5,-0.75) 15(-3.5,-1.25) 16(-3.5,-1.75) 17(-3.5,-2.25) 18(-3.5,-2.75) 19(-3.5,-3.25) 20(-3.5,-3.75) 21(-3.5,-4.25) 22(-3.5,-4.75) 23(-3.5,-5.25) 24(-3.5,-5.75) 25(3.5,-5.75) 26(3.5,-5.25) 27(3.5,-4.75) 28(3.5,-4.25) 29(3.5,-3.75) 30(3.5,-3.25) 31(3.5,-2.75) 32(3.5,-2.25) 33(3.5,-1.75) 34(3.5,-1.25) 35(3.5,-0.75) 36(3.5,-0.25) 37(3.5,0.25) 38(3.5,0.75) 39(3.5,1.25) 40(3.5,1.75) 41(3.5,2.25) 42(3.5,2.75) 43(3.5,3.25) 44(3.5,3.75) 45(3.5,4.25) 46(3.5,4.75) 47(3.5,5.25) 48(3.5,5.75)
  silkscreen extent -3.62,-6.55 2.4,6.55, body extent -3.9,-6.55 3.9,6.55, height 2
TO252 [mm]
  rect 1.2x2.2 smd: 1(-2.279,-7.409) 3(2.321,-7.409)
  rect 6.35x7.62 smd: 2(0.021,-0.009)
  silkscreen extent -3.2,-5.1 3.3,0.6, body extent -3.22,-7.29 3.28,1.41, height 2.3